# Altium PCB USB_Control.PcbDoc (part 2 of 2)
Units mil, origin at the board's own origin, x right, y up, seen from the top; angles counter-clockwise.
Board outline 3100 x 2250 mil, 4 copper layers (Component Side, Ground Plane, Power Plane, Solder Side), stack 26.634 mil thick; 203 components, 126 nets, 671 pads, 284 vias.
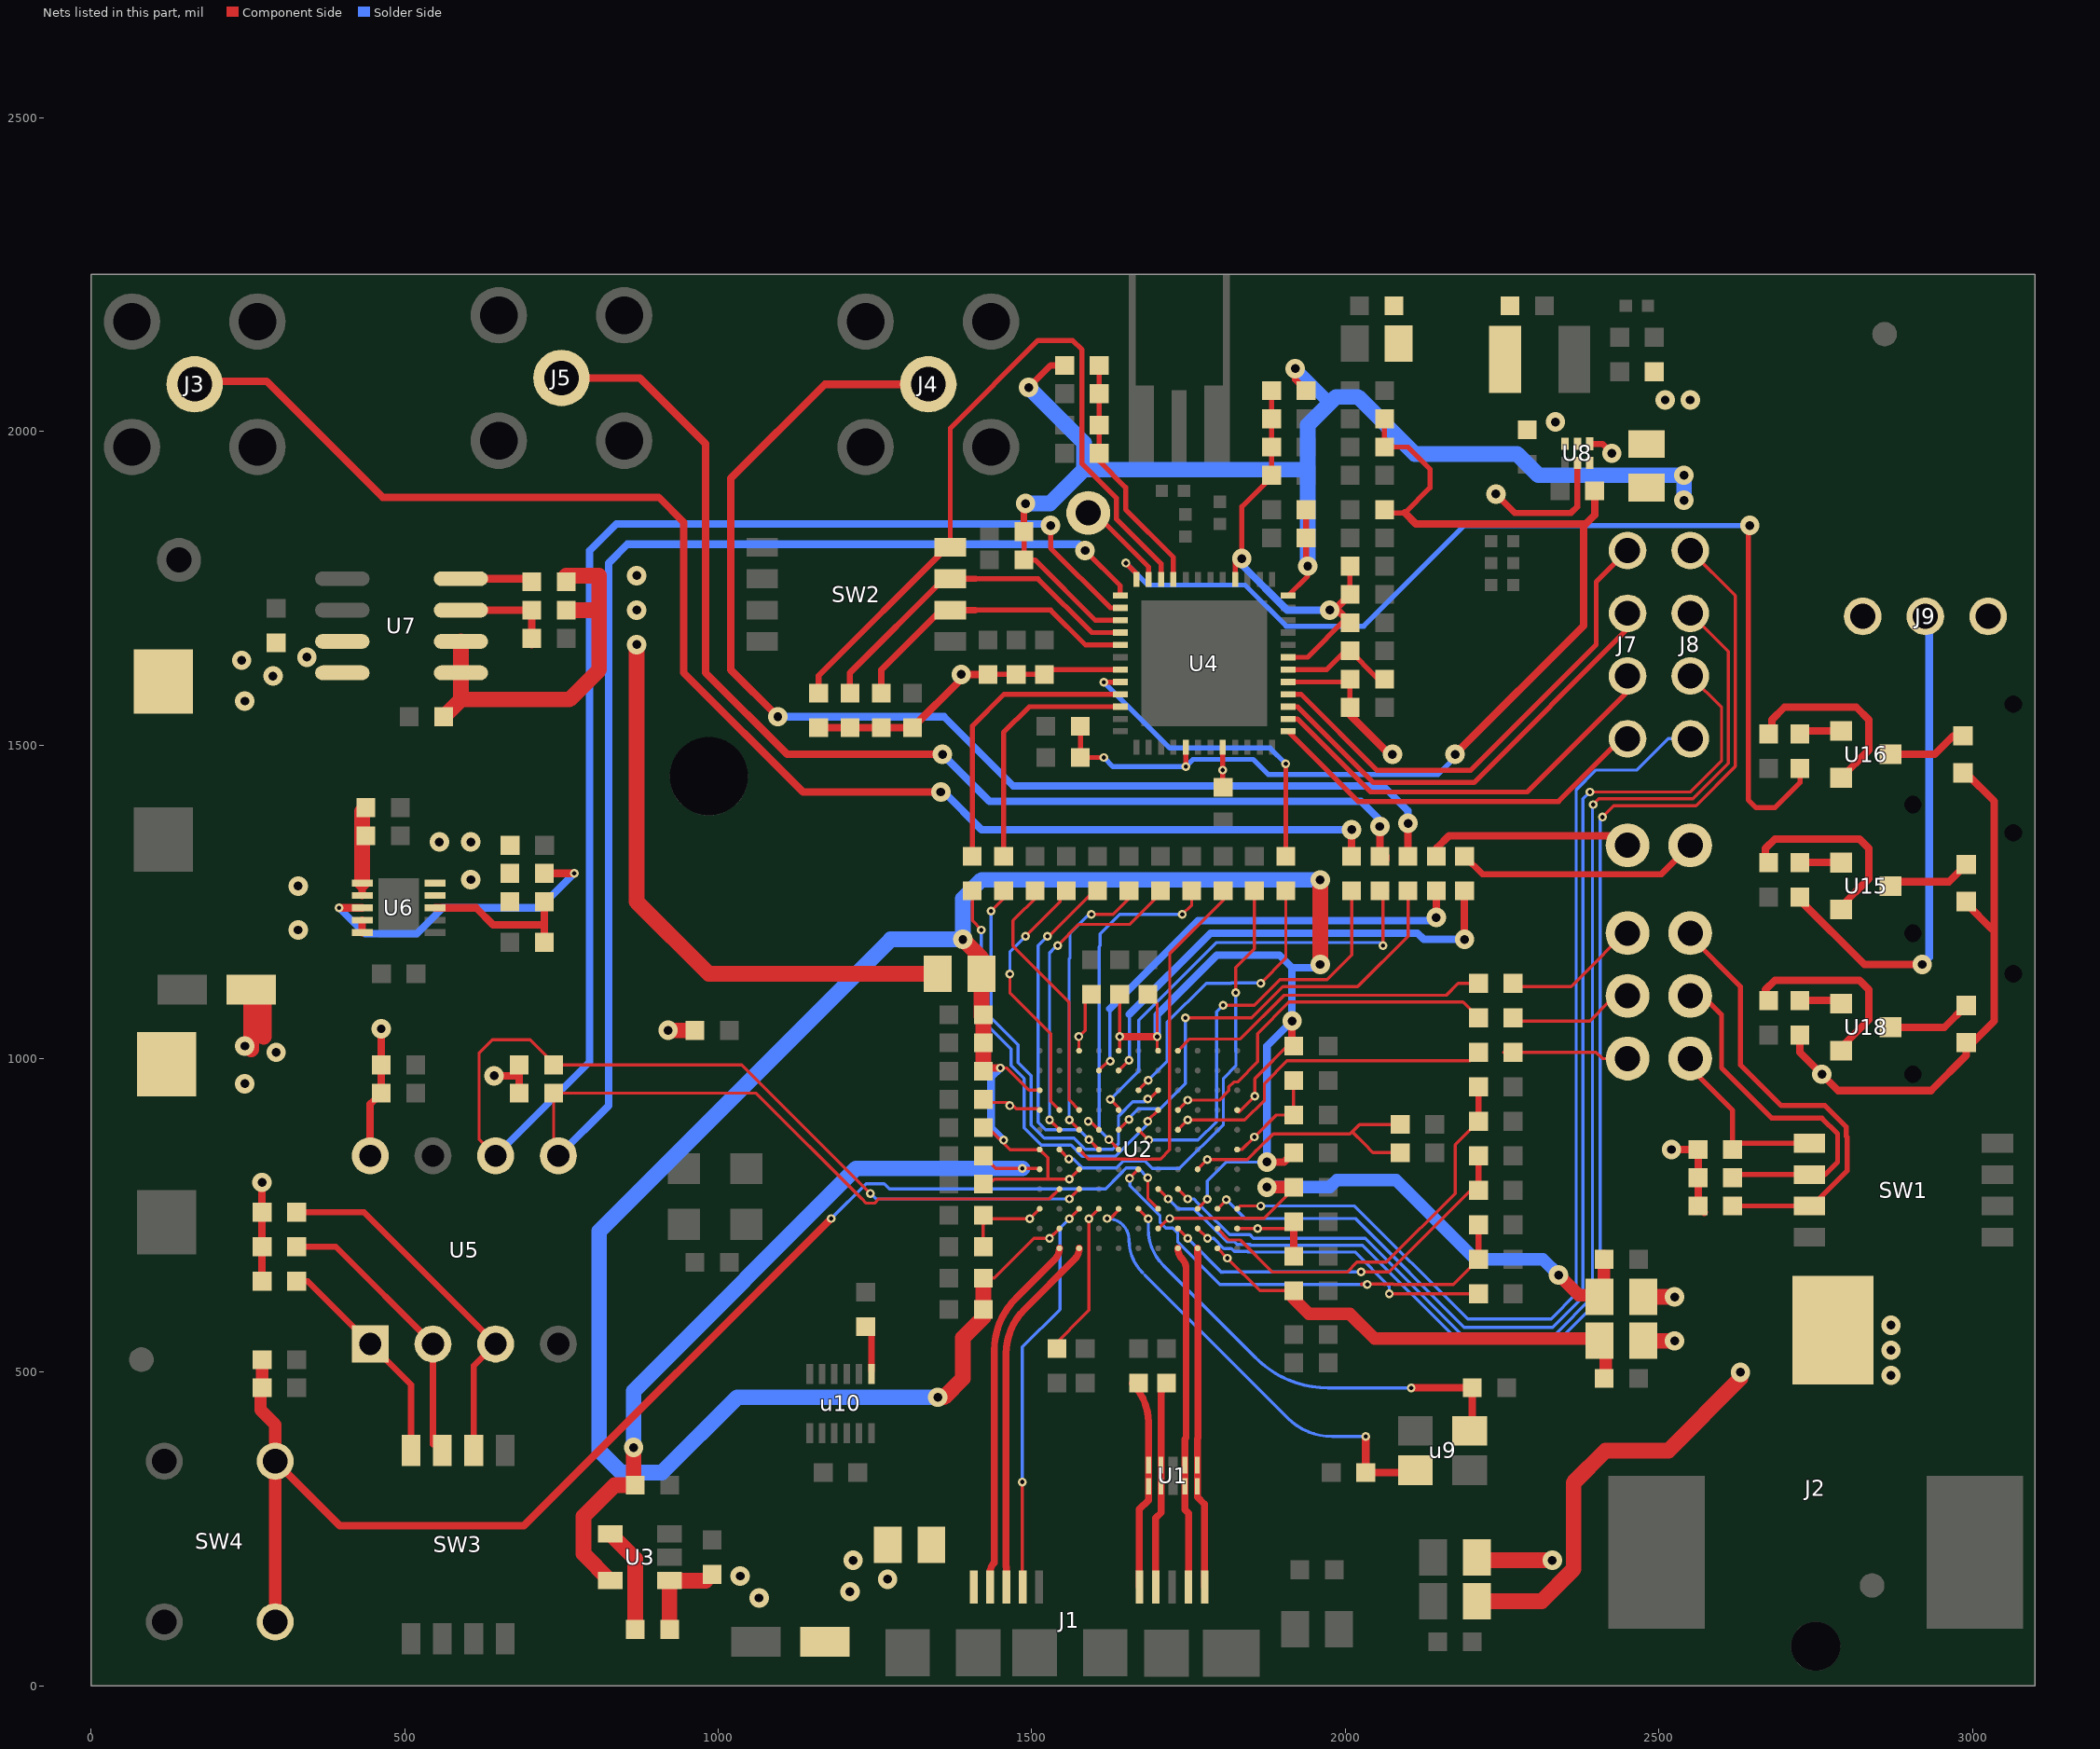
[diagram p4: the nets of this part, all layers, seen from the top]

## Via types
v1: diameter 31, hole 14, Component Side to Solder Side, tented both sides, 162 vias
v2: diameter 14, hole 7, Component Side to Solder Side, tented both sides, 109 vias
v3: diameter 19.68, hole 7.87, Component Side to Solder Side, tented both sides, 13 vias

## Nets (pads, with @x,y where several pads share a name; then routed paths per layer and width w, separated by ;. In a path a pad name is that pad's centre, name@x,y a point inside that pad or via, vN(x,y) a via of type N, cw(c..) or ccw(c..) an arc to the next point about the centre after c; other vN are vias at no path point) (continued)
NetC78_1: C78.1 R58.0 SW4.2 U2.C5 | length 2165.4
  Component Side w5: v2(1685,810) 1685,777.01 U2.C5@1701.5,760.51
  Component Side w12: SW4.2@293.58,357.95 396.53,255 690,255 v2(1180,745)
  Component Side w20: R58.0@270,472.5 270,440 293.58,416.42 SW4.2@293.58,357.95 SW4.2@293.58,102.05 ; R58.0@272.5,475 C78.1@272.5,520
  Solder Side w5: v2(1180,745) 1235.5,800.5 1264.5,800.5 1272.74,792.26 1617.81,792.26 1640.5,814.94 1640.5,815.42 1650.58,825.5 1669.5,825.5 v2(1685,810)
NetJ1_1: J1.1 L1.1
NetJ3_1: J3.1 R11.1 | length 2306.8
  Component Side w12: J3.1@180,2080 280,2080 465,1895 905,1895 945,1855 945,1615 1135,1425 v1(1355,1425) ; R11.1@2010,1325 v1(2010,1365)
  Solder Side w12: v1(1355,1425) 1360,1425 1420,1365 v1(2010,1365)
NetJ4_1: J4.1 R13.1 | length 1963.2
  Component Side w12: v1(1095,1545) 1020,1620 1020,1925 1170,2075 J4.1@1335,2075 J4.1@1360,2050 ; R13.1@2100,1322.5 2100,1342.5 v1(2100,1375)
  Solder Side w12: v1(1095,1545) 1360,1545 1470,1435 2060,1435 2100,1395 v1(2100,1375)
NetJ5_1: J5.1 R15.1 | length 1877.5
  Component Side w12: J5.1@750,2085 875,2085 980,1980 980,1615 1110,1485 v1(1357.5,1485) ; v1(2055,1370) 2055,1332.5 2065,1322.5 R15.1@2065,1317.5
  Solder Side w12: v1(1357.5,1485) 1432.5,1410 2025,1410 2055,1380 v1(2055,1370)
NetJ7_1: J7.1 U4.28 | length 795.1
  Component Side w8: U4.28@1908.86,1580.79 1929.21,1580.79 2050.5,1459.5 2199.5,1459.5 2400,1660 2400,1760 J7.1@2450,1810
NetJ7_2: J7.2 U4.27 | length 717.8
  Component Side w8: U4.27@1908.86,1561.1 1923.9,1561.1 2045,1440 2205,1440 2450,1685 J7.2@2450,1710
NetJ7_3: J7.3 U4.26 | length 680.6
  Component Side w8: U4.26@1908.86,1541.42 1923.58,1541.42 2040,1425 2290,1425 2450,1585 J7.3@2450,1610
NetJ7_4: J7.4 U4.25 | length 646.5
  Component Side w8: U4.25@1908.86,1521.73 2020.59,1410 2340,1410 2438.27,1508.27 2438.27,1521.73 J7.4@2450,1510
NetJ8_1: J8.1 U2.D5 | length 2222.5
  Component Side w5: U2.D5@1701.5,792.01 v2(1717.24,776.26) ; v2(2410,1385) 2428,1403 2559.11,1403 2622,1465.89 2622,1738 J8.1@2550,1810
  Solder Side w5: v2(1717.24,776.26) 1717.69,776.26 1733.69,760.26 1758.28,760.26 1769.02,749.52 1769.5,749.52 1810.75,708.27 1822.71,708.27 1827.48,703.5 1848.04,703.5 1849.02,702.52 2027.48,702.52 2180.36,549.64 2339.64,549.64 2406.5,616.5 2406.5,1381.5 v2(2410,1385)
NetJ8_2: J8.2 U2.D4 | length 2075.3
  Component Side w5: U2.D4@1732.99,792.01 v2(1748.74,776.26) ; v2(2395,1405) 2404,1414 2554.56,1414 2611,1470.44 2611,1649 J8.2@2550,1710
  Solder Side w5: v2(1748.74,776.26) 1758.32,776.26 1764.5,770.08 1764.5,769.6 1773.58,760.52 1774.05,760.52 1815.3,719.27 1847.82,719.27 1853.58,713.52 2032.04,713.52 2184.91,560.64 2335.09,560.64 2394,619.56 2394,1404 v2(2395,1405)
NetJ8_3: J8.3 U2.C2 | length 1889.5
  Component Side w5: U2.C2@1795.98,760.51 1810,774.53 v2(1810,775) ; v2(2390,1425) 2550,1425 2600,1475 2600,1560 J8.3@2550,1610
  Solder Side w5: v2(1810,775) 1840,745 2016.11,745 2189.47,571.64 2330.53,571.64 2379,620.11 2379,1414 v2(2390,1425)
NetJ8_4: J8.4 U2.C1 | length 1652.7
  Component Side w5: U2.C1@1827.48,760.51 1831.97,765 v2(1865,765)
  Solder Side w5: v2(1865,765) 2015,765 2195,585 2328.33,585 2368,624.67 2368,1428 2400,1460 2465,1460 2515,1510 J8.4@2550,1510
NetJ9_2: J9.2 L11.2 R60.1 | length 804.3
  Component Side w12: R60.1@2725,1257.5 2725,1252.79 2827.79,1150 v1(2920,1150)
  Solder Side w12: v1(2920,1150) 2931,1161 2931,1699 J9.2@2925,1705
  other v1: 2510,2050 2550,2050
NetK1_1: K1.1 R3.1 SW1.1 | length 299.6
  Component Side w8: K1.1@2550,1000 2550,985 2617.5,917.5 R3.1@2617.5,855 2627.5,865 SW1.1@2740,865
NetK2_1: K2.1 R2.1 SW1.2 | length 574.6
  Component Side w5: R2.1@2617.5,810 R2.1@2622.5,815
  Component Side w8: K2.1@2570,1090 2580,1090 2600,1070 2600,985 2680,905 2760,905 2785,880 2785,835 2765,815 SW1.2@2740,815 R2.1@2622.5,815
NetK3_1: K3.1 R1.1 SW1.3 | length 749.3
  Component Side w8: K3.1@2550,1220 2550,1195 2630,1115 2630,990 2695,925 2765,925 2799,891 2799,876 2800,875 2800,820.9 2744.1,765 SW1.3@2740,765 R1.1@2617.5,765
NetL5_1: L5.1 U8.2
NetL12_2: L12.2 L13.1 R56.1 R57.0
NetR4_1: R4.1 U2.C8 | length 254.9
  Component Side w5: R4.1@1530,537.5 1591.26,598.76 v2(1591.26,744.76) U2.C8@1607.01,760.51
NetR5_1: R5.1 U2.B3 | length 498.1
  Component Side w5: U2.B3@1764.49,729.02 v2(1780.24,713.27) ; v2(2070,625) R5.1@2212.5,625
  Solder Side w5: v2(1780.24,713.27) 1790.2,713.27 1806.19,697.27 1818.15,697.27 1822.92,692.5 1843.48,692.5 1844.47,691.52 2015.4,691.52 2070,636.92 v2(2070,625)
NetR6_0: R6.0 U2.L4 | length 524
  Component Side w5: U2.L4@1732.99,1012.48 1751.69,1031.18 1832.3,1031.18 1902.11,1101 2161,1101 2180,1120 R6.0@2212.5,1120
NetR7_0: R7.0 U2.H4 | length 591
  Component Side w5: U2.H4@1732.99,917.99 v2(1748.74,933.74) 1798.94,933.74 1814.26,949.06 1814.26,954.97 1822,962.71 1827.91,962.71 1860,994.8 1860,1040 1910,1090 2187.5,1090 R7.0@2212.5,1065
NetR8_0: R8.0 U2.G4 | length 546.4
  Component Side w5: U2.G4@1732.99,886.5 v2(1748.74,902.24) 1839.64,902.24 1870.97,933.58 1870.97,960.49 1906.98,996.5 2199,996.5 R8.0@2212.5,1010
NetR9_0: R9.0 U2.H5 | length 682.7
  Component Side w5: R9.0@1405,1267.5 1405,1220 1419.5,1205.5 v2(1419.5,1205) v2@1420,1205 ; v2(1685,900) v2@1685,901.5 ; v2@1685,905 v2@1685,901.5 ; U2.H5@1701.5,917.99 v2@1685,901.5
  Solder Side w5: v2(1419.5,1205) 1419.5,1062.5 1467,1015 1467,989.02 1488,968.03 1488,889.48 1515.44,862.04 1562.5,862.04 1580.28,844.25 1633.73,844.25 1685,895.52 v2(1685,900)
NetR9_1: R9.1 U4.9 | length 464.7
  Component Side w8: R9.1@1405,1322.5 1405,1530 1455.79,1580.79 U4.9@1641.14,1580.79
NetR10_0: R10.0 U2.J5 | length 692
  Component Side w5: v2(1435,1235) 1455,1255 R10.0@1455,1267.5 ; v2@1685,935 v2(1685,935.5) 1687.51,935.5 U2.J5@1701.5,949.49
  Solder Side w5: v2(1435,1235) 1435,1065 1478,1022 1478,993.58 1499,972.58 1499,894.04 1520,873.04 1567.05,873.04 1584.84,855.25 1629.18,855.25 1638.26,864.33 1638.26,908.18 1661.08,931 1680.5,931 v2(1685,935.5)
NetR10_1: R10.1 U4.10 | length 400.7
  Component Side w8: R10.1@1455,1322.5 1455,1520 1496.1,1561.1 U4.10@1641.14,1561.1
NetR11_0: R11.0 U2.G6 | length 674
  Component Side w5: U2.G6@1670,886.5 v2(1686.5,870) ; v2(1805,1085) 1855,1085 1896,1126 1971,1126 2010,1165 R11.0@2010,1267.5
  Solder Side w5: v2(1686.5,870) 1765,870 1794.5,899.5 1794.5,1074.5 v2(1805,1085)
NetR12_0: R12.0 U2.D9 U4.2 U5.6 | length 3234.5
  Component Side w5: U5.6@645,845 618.5,871.5 618.5,1008.5 640,1030 700,1030 740,990 1037.52,990 v2(1242.52,785) ; v2(1559.76,776.26) U2.D9@1575.51,792.01
  Component Side w8: v1(1530,1850) 1530,1814 1625.42,1718.58 U4.2@1641.14,1718.58
  Solder Side w5: v2(1242.52,785) 1251.26,776.26 v2(1559.76,776.26)
  Solder Side w12: U5.6@645,845 795,995 795,1810 837.5,1852.5 1537.5,1852.5 1535,1850 v1(1530,1850)
NetR13_0: R13.0 U2.G7 | length 709.9
  Component Side w5: U2.G7@1638.5,886.5 v2(1655,903) v2@1655,905 ; v2(1745,1065) 1850.56,1065 1900.56,1115 1923.08,1115 1923.58,1114.5 2019.5,1114.5 2100,1195 R13.0@2100,1252.5
  Solder Side w5: v2@1655,905 1670,920 1705,920 1745,960 v2(1745,1065)
NetR14_0: R14.0 U2.D10 U4.1 U5.5 | length 2830.7
  Component Side w5: U5.5@737.5,852.5 R14.0@737.5,945 1060,945 1228.74,776.26 1229.34,776.26 1236.1,769.5 1248.94,769.5 1255.7,776.26 1528.27,776.26 U2.D10@1544.02,792.01
  Component Side w8: v1(1585,1810) 1641.14,1753.86 U4.1@1641.14,1738.27
  Solder Side w12: U5.5@745,845 825,925 825,1790 855,1820 1575,1820 v1(1585,1810)
NetR15_0: R15.0 U2.H7 | length 701
  Component Side w5: v2(1625,935) 1638.5,921.5 U2.H7@1638.5,917.99 ; v2(2060,1180) 2060,1260 R15.0@2067.5,1267.5
  Solder Side w5: v2(1625,935) 1670.5,980.5 1670.5,1061.01 1794.49,1185 2055,1185 v2(2060,1180)
NetR16_0: R16.0 U2.K7 | length 771.3
  Component Side w5: U2.K7@1638.5,980.98 v2(1655,997.48)
  Component Side w12: v1(2190,1190) R16.0@2190,1267.5
  Solder Side w5: v2(1655,997.48) 1655.5,997.98 1655.5,1070.5
  Solder Side w12: 1655.5,1070.5 1785,1200 2115,1200 2125,1190 v1@2195,1190
NetR16_1: R16.1 TP3.1 | length 390.9
  Component Side w10: R16.1@2190,1322.5 2218.5,1294 2504,1294 TP3.1@2550,1340
NetR17_0: R17.0 U2.K8 | length 727.4
  Component Side w5: U2.K8@1607.01,980.98 v2@1625,998.98
  Component Side w12: v1(2145,1225) R17.0@2145,1267.5
  Solder Side w5: 1624.5,1079.5 1624.5,999.48 v2@1625,998.98
  Solder Side w12: 1624.5,1079.5 1765,1220 v1@2145,1220
  other v2: 1625,996
NetR17_1: R17.1 TP4.1 | length 341.5
  Component Side w12: R17.1@2146.25,1321.25 2146.25,1336.25 2165,1355 2450,1355 TP4.1@2450,1340
NetR18_0: R18.0 U2.J6 | length 466.7
  Component Side w5: U2.J6@1670,949.49 v2(1685.75,965.24) ; v2(1865,1120) 1905,1160 R18.0@1905,1267.5
  Solder Side w5: v2(1685.75,965.24) 1715.5,994.99 1715.5,1057.42 1778.08,1120 1818.08,1120 1818.58,1120.5 1864.5,1120.5 v2(1865,1120)
NetR18_1: R18.1 U4.8 | length 517.7
  Component Side w8: v2(1615,1600) 1640.67,1600 U4.8@1641.14,1600.47 ; R18.1@1905,1322.5 v2(1905,1470)
  Solder Side w8: v2(1615,1600) 1720,1495 1880,1495 v2(1905,1470)
NetR19_0: R19.0 U2.H9 | length 402.3
  Component Side w5: R19.0@1510,1260 1470,1220 1470,1179.71 1559.27,1090.44 1559.27,1088.81 1559.5,1088.58 1559.5,934 U2.H9@1575.51,917.99
NetR20_0: R20.0 U2.H10 | length 418.5
  Component Side w5: v2(1465,1135) 1465,1105 1530,1040 1530,932.01 U2.H10@1544.02,917.99 ; v2@1486.92,1195 v2(1490,1195) 1510.96,1215.96 1545,1250 R20.0@1545,1267.5
  Solder Side w5: v2(1465,1135) 1465,1170 v2(1490,1195)
NetR21_0: R21.0 U2.F8 | length 522.7
  Component Side w5: v2(1525,1195) 1527.5,1195 R21.0@1600,1267.5 ; v2(1591.26,870.75) U2.F8@1607.01,855
  Solder Side w5: v2(1525,1195) 1510,1180 1510,898.59 1521.85,886.74 1575.26,886.74 v2(1591.26,870.75)
NetR22_0: R22.0 U2.G9 | length 450
  Component Side w5: v2(1559.76,902.24) U2.G9@1575.51,886.5 ; v2(1595,1230) 1630,1230 1655,1255 R22.0@1655,1267.5
  Solder Side w5: v2(1559.76,902.24) 1559.5,902.51 1559.5,1159.5 1561,1161 1561,1199.94 1591.06,1230 v2(1595,1230)
NetR23_0: R23.0 U2.G10 | length 504.8
  Component Side w5: v2(1528.27,902.24) U2.G10@1544.02,886.5 ; v2(1541.06,1180) 1575.06,1214 1656.5,1214 R23.0@1710,1267.5
  Solder Side w5: v2(1528.27,902.24) 1528.27,1168.27 v2@1536.3,1176.3
NetR24_0: R24.0 U2.F7 | length 555.2
  Component Side w5: v2(1622.76,870.75) U2.F7@1638.5,855 ; v2(1740,1230) 1755,1245 R24.0@1755,1267.5 R24.0@1765,1267.5
  Solder Side w5: v2(1622.76,870.75) 1607.26,886.25 1607.26,1178.32 1609,1180.06 1609,1199 1640,1230 v2(1740,1230)
NetR25_0: R25.0 U2.F9 | length 604.7
  Component Side w5: U2.F9@1575.51,855 1590.51,840 1705.2,840 1719.77,854.57 1719.77,1094.77 1720,1095 1720,1167.5 1805,1252.5 R25.0@1805,1267.5
NetR26_0: R26.0 R30.1 U2.B2 | length 645.3
  Component Side w5: U2.B2@1795.98,729.02 1814.26,710.74 1832.96,710.74 1884.2,659.5 2002.58,659.5 2018.58,675.5 2065.5,675.5 2175,785 2175,862.5 R26.0@2212.5,900
  Component Side w10: R26.0@2212.5,900 R30.1@2212.5,955
NetR27_0: R27.0 R31.1 U2.B4 | length 618
  Component Side w5: U2.B4@1732.99,729.02 v2(1748.74,713.27) ; v2(2025,660) 2070,660 2200,790 R27.0@2212.5,790
  Component Side w10: R27.0@2212.5,790 R31.1@2212.5,845
  Solder Side w5: v2(1748.74,713.27) 1803.26,658.75 1804.51,660 v2(2025,660)
NetR28_0: R28.0 R32.1 U2.E6 | length 759.1
  Component Side w5: v2@1656.5,810 U2.E6@1670,823.5 ; v2(2035,640) 2026,640 2025.5,640.5 2061.42,640.5 2061.92,640 2063.08,640 2063.58,640.5 2076.42,640.5 2076.92,640 2172.5,640 R28.0@2212.5,680
  Component Side w10: R28.0@2212.5,680 R32.1@2212.5,735
  Solder Side w5: v2@1656.5,810 1656.5,797.43 1671.25,782.68 1671.25,782.19 1704.5,748.94 1704.5,738.58 1713.58,729.5 1725,729.5 1732.74,721.76 1732.74,707.34 1800.09,640 v2(2035,640)
  other v2: 1656,809
NetR29_0: R29.0 U2.F10 | length 705.5
  Component Side w5: U2.F10@1544.02,855 v2(1559.02,840) ; v2(1825,1105) 1825,1145 1855,1175 R29.0@1855,1267.5
  Solder Side w5: v2(1559.02,840) 1566.41,840 1580.91,825.5 1635.02,825.5 1646.02,836.5 1680.42,836.5 1691.92,825 1735.56,825 1805.5,894.94 1805.5,968.58 1825.5,988.58 1825.5,1010.5 1825,1011 v2(1825,1105)
NetR33_0: R33.0 U3.4 | length 168.9
  Component Side w25: U3.4@827.76,242.4 867.5,202.66 R33.0@867.5,90
NetR47_0: R47.0 SW3.8 U5.1 | length 360.8
  Component Side w10: R47.0@327.5,645 345,645 U5.1@445,545 510,480 SW3.8@510,370
NetR48_0: R48.0 SW3.7 U5.2 | length 462.9
  Component Side w10: R48.0@327.5,700 390,700 U5.2@545,545 545,390 ; 545,385 545,390 ; SW3.7@560,375 545,390
NetR49_0: R49.0 SW3.6 U5.3 | length 594
  Component Side w10: R49.0@327.5,755 435,755 U5.3@645,545 610,510 SW3.6@610,375 SW3.6@610,370
NetR50_0: R50.0 U6.3 | length 515.1
  Component Side w12: v2(395.31,1240.31) U6.3@432.24,1240.31 ; R50.0@725.31,1297.81 727.81,1295.31 v2(770.31,1295.31)
  Solder Side w12: v2(395.31,1240.31) 436.84,1198.79 519.05,1198.79 560.57,1240.31 715.31,1240.31 v2(770.31,1295.31)
NetR51_0: R51.0 U7.8 | length 108
  Component Side w12: U7.8@589.49,1765 R51.0@697.5,1765
NetR52_0: R52.0 R54.1 U7.7 | length 168
  Component Side w12: U7.7@589.49,1715 R52.0@702.5,1715 R54.1@702.5,1660
NetR53_0: R53.0 R55.1 U6.8 | length 240.1
  Component Side w12: U6.8@548.38,1240.31 613.81,1240.31 640.81,1213.31 722.31,1213.31 ; R55.1@722.81,1185.31 R53.0@722.81,1240.31
NetR59_0: R59.0 u10.7 | length 69.5
  Component Side w10: u10.7@1244.21,502.24 R59.0@1244.21,571.71
NetR60_0: R60.0 U15.B | length 55.7
  Component Side w12: R60.0@2725,1312.5 U15.B@2780.73,1312.5
NetR61_0: R61.0 U16.B | length 60.7
  Component Side w12: R61.0@2729.9,1522.4 U16.B@2790.63,1522.4
NetR61_1: R61.1 U4.48 | length 1701.5
  Component Side w8: v2(1650,1790) 1666.73,1773.27 U4.48@1666.73,1763.86 ; v1@2642.5,1847.5 2642.5,1412.5 2655,1400 2685,1400 2725,1440 R61.1@2725,1462.5
  Component Side w12: v1@2642.5,1847.5 v1(2645,1850)
  Solder Side w8: v2(1650,1790) 1685,1755 1840,1755 1905.5,1689.5 2029.5,1689.5 2190,1850 v1(2645,1850)
NetR63_0: R63.0 U18.B | length 60.7
  Component Side w12: R63.0@2720,1092.5 R63.0@2725,1092.5 U18.B@2780.73,1092.5
NetR64_1: R64.1 U18.E | length 310.7
  Component Side w12: R64.1@2670,1087.5 2670,1110 2685,1125 2820,1125 2835,1110 2835,1061.97 U18.E@2790.63,1017.6
NetR65_1: R65.1 U15.E | length 315.7
  Component Side w12: R65.1@2670,1307.5 2670,1335 2685,1350 2820,1350 2835,1335 2835,1286.97 U15.E@2790.63,1242.6
NetR66_1: R66.1 U16.E | length 294.8
  Component Side w12: R66.1@2680,1527.5 2680,1540 2700,1560 2815,1560 2835,1540 2835,1491.97 U16.E@2790.63,1447.6
NetTP2_1: TP2.1 U4.47 | length 151.9
  Component Side w8: TP2.1@1590,1870 1600,1870 1686.42,1783.58 U4.47@1686.42,1763.86
NetU11_C: U11.C U15.C | length 132
  Component Side w12: U15.C@2869.37,1281.97 2962.47,1281.97 U11.C@2990,1309.5
NetU12_C: U12.C U16.C | length 132.8
  Component Side w12: U16.C@2869.37,1485 2940,1485 2969.5,1514.5 U12.C@2990,1514.5
NetU14_C: U14.C U18.C | length 134.9
  Component Side w12: U18.C@2869.37,1050 2955.5,1050 U14.C@2990,1084.5
OEN: R39.0 SW2.2 U4.5 | length 481
  Component Side w8: 1410,1715 1530,1715 1585.47,1659.53 U4.5@1641.14,1659.53
  Component Side w10: R39.0@1260,1582.5 1260,1620 1355,1715 1410,1715
OSS_SEL: R38.0 SW2.3 U4.4 | length 561.3
  Component Side w8: 1410,1765 1510,1765 1595.79,1679.21 U4.4@1641.14,1679.21
  Component Side w10: R38.0@1210,1582.5 1210,1615 1360,1765 1410,1765
OTG_ID: J1.4 U2.C9 | length 639.8
  Component Side w5: J1.4@1485,158.25 v2(1485,325) ; v2(1559.76,744.76) U2.C9@1575.51,760.51
  Solder Side w5: v2(1485,325) 1485,540 1545,600 1545,730 v2(1559.76,744.76)
PDN: C30.0 R36.1 U4.30 | length 187.7
  Component Side w8: U4.30@1908.86,1620.16 1970.16,1620.16 2003.75,1653.75 R36.1@2052.5,1605 ; R36.1@2052.5,1600 R36.1@2062.5,1600
PMODE_0: K1.2 R8.1 | length 201.6
  Component Side w5: R8.1@2252.5,1010 R8.1@2267.5,1010 2400,1010 2410,1000 K1.2@2450,1000
PMODE_1: K2.2 R7.1 | length 207.4
  Component Side w5: R7.1@2255,1060 2390,1060 2420,1090 K2.2@2450,1090
PMODE_2: K3.2 R6.1 | length 243.5
  Component Side w5: R6.1@2265,1115 2360,1115 K3.2@2465,1220
SEL: R37.0 SW2.4 U4.46 | length 1205.3
  Component Side w8: SW2.4@1370,1815 1370,2005 1510,2145 1565,2145 1580,2130 1580,1948.36 1635,1893.36 1635,1860 1706.1,1788.9 U4.46@1706.1,1763.86
  Component Side w10: R37.0@1160,1582.5 1160,1610.52 1364.48,1815 SW2.4@1370,1815
SS_D_N: J1.2 U2.A10 | length 578.4
  Component Side w11: J1.2@1433.5,157.75 1433.5,180.56 cw(c1455.69,180.56) 1440,196.25 1440,533.99 cw(c1559,533.99) 1474.85,618.13 1536.79,680.07 ccw(c1519.33,697.52) U2.A10@1544.02,697.52
SS_D_P: J1.3 U2.A9 | length 582.8
  Component Side w11: J1.3@1459.5,157.75 1459.5,189.04 ccw(c1457.79,189.04) 1459,190.25 1459,529.36 cw(c1559,529.36) 1488.29,600.07 1568.28,680.07 ccw(c1550.83,697.52) U2.A9@1575.51,697.52
SS_RX_N: J1.10 U1.5 U1.6 U2.A3 | length 543.7
  Component Side w11: 1764,394 U1.6@1764,352 U1.5@1764,318 1764,301 1775.5,289.5 J1.10@1775.5,157.75 ; U2.A3@1764.49,697.52 1764.49,688.02 ccw(c1766.24,688.02) 1765,686.78 1765,395
SS_RX_P: J1.9 U1.4 U1.7 U2.A4 | length 543.2
  Component Side w11: U2.A4@1732.99,697.52 ccw(c1757.68,697.52) 1740.22,680.07 cw(c1726.27,666.12) 1746,666.12 1746,395 ; 1744,393 U1.7@1744,352 U1.4@1744,318 1744,281 1750,275 J1.9@1750,158.25
SS_TX_N: C2.0 J1.6 U1.1 U1.10 | length 337.7
  Component Side w11: C2.0@1660,482.5 cw(c1597.23,419.73) 1686,419.73 U1.10@1686,352 U1.1@1686,318 1686,296 1671.5,281.5 J1.6@1671.5,157.75
SS_TX_P: C3.0 J1.7 U1.2 U1.9 | length 330.7
  Component Side w11: J1.7@1697.5,157.75 1697.5,267.5 1706,276 U1.2@1706,318 U1.9@1706,352 1706,460.77 cw(c1736.73,460.77) C3.0@1715,482.5
U3RX_VDDQ: C54.1 C55.1 L9.2 U2.A2 | length 726.8
  Component Side w5: U2.A2@1795.98,697.52 v2(1811.73,681.77) 1863.5,630 C54.1@1917.5,630
  Component Side w20: C54.1@1917.5,630 1917.5,617.5 1942,593 2007,593 2046.5,553.5 2398.66,553.5 L9.2@2400.16,555 ; C55.1@2415.16,490 L9.2@2415.16,545
U3TX_VDDQ: C56.1 C57.1 L10.2 U2.B5 | length 975.3
  Component Side w5: U2.B5@1701.5,729.02 1713.54,741.06 1715.42,741.06 1719.86,745.5 1870.5,745.5 1917.5,792.5 C56.1@1917.5,795 C56.1@1917.5,805
  Component Side w20: v1(1875,795) C56.1@1917.5,795 ; v1(2340,655) 2372.5,622.5 2407.34,622.5 2412.5,627.66 C57.1@2412.5,685
  Solder Side w20: v1(1875,795) 1975,795 1986.5,806.5 2080.78,806.5 2207.28,680 2315,680 v1(2340,655)
  other v2: 1720,745
USB3_VBUS: C5.1 C69.1 U2.E11 U3.5 | length 1240.3
  Component Side w5: C69.1@1422.5,845 1442.5,825 v2(1485,825) 1511.02,825 U2.E11@1512.52,823.5
  Component Side w25: U3.5@827.76,167.6 785,210.36 785,270 835,320 C5.1@867.5,320 865,322.5 v1(865,380)
  Solder Side w25: v1(865,380) 865,470 1220,825 v2(1485,825)
V1P2: C72.+ L6.1 L7.1 L9.1 L10.1 R51.1 R52.1 U7.5 U7.6 | length 2317.8
  Component Side w25: C72.+@562,1545 589.49,1572.49 ; U7.6@589.49,1665 U7.5@589.49,1615 589.49,1572.49 ; R52.1@757.5,1715 805,1715 ; R51.1@757.5,1770 810,1770 810,1620 762.49,1572.49 589.49,1572.49 ; v1(870,1660) 870,1250 985,1135 L6.1@1350.16,1135 ; L7.1@2209.84,135 2313.08,135 2364,185.92 2364,324 2415,375 2515,375 2630,490 v1(2630,500) ; L9.1@2474.84,550 v1(2525,550) ; L10.1@2474.84,620 v1(2525,620)
  other v1: 870,1715 870,1770
V5P0: C4.1 C33.1 C34.1 C35.1 C36.1 C67.+ C68.+ C70.1 J9.3 L1.2 R33.1 U3.1 U6.1 U6.2 U6.4 U6.5 U7.3 U7.4 | length 475.6
  Component Side w12: U6.5@432.24,1200.94 U6.4@432.24,1220.63 ; U6.2@432.24,1260 U6.1@432.24,1279.68
  Component Side w25: v1@255.12,1014.88 C33.1@255.12,1110 275,1090.12 275,1035 ; U6.1@432.24,1279.68 432.24,1394.24 C67.+@438,1400 ; R33.1@922.24,90.26 U3.1@922.24,167.6 C4.1@980.1,167.6
  other v1: 1065,140 1210,150 1270,170 1035,175 1215,200 245,960 295,1010 245,1020 330,1205 330,1275 245,1570 290,1610 240,1635 344,1640
V12P0: J2.1 J9.1
  other v1: 2870,495 2870,535 2870,575
VDD: C39.1 C40.1 C41.1 C42.1 C43.1 C44.1 C45.1 C46.1 C47.1 C48.1 C49.1 L6.2 U2.B10 U2.C3 U2.E9 U2.F11 U2.H1 U2.J11 U2.L5 U2.L7 | length 4997.9
  Component Side w5: C41.1@1422.5,650 1440,650 1503.27,713.27 v2(1528.27,713.27) U2.B10@1544.02,729.02 ; C49.1@1422.5,790 1440.26,807.76 v2(1559.76,807.76) U2.E9@1575.51,823.5 ; C46.1@1430,890 1465.5,854.5 1512.02,854.5 U2.F11@1512.52,855 1525.74,841.78 1525.74,808.5 ; v2(1450,985) 1460,985 1485,960 1495.51,949.49 U2.J11@1512.52,949.49 ; U2.L7@1638.5,1012.48 1640,1013.98 v2(1640,1035) C40.1@1640,1092.5 ; C45.1@1685,1102.5 1700,1087.5 v2(1700,1035) 1700,1013.98 U2.L5@1701.5,1012.48 ; U2.C3@1764.49,760.51 v2(1780,776.02) ; U2.H1@1827.48,917.99 1830.47,915 v2(1855.47,940) 1855.47,967.97 1915,1027.5 C48.1@1917.5,1030 ; C48.1@1905,1015 C48.1@1907.5,1015
  Component Side w12: C42.1@1422.5,1010 1422.5,992.5 1430,985 v2(1450,985) ; v2(1640,1035) v2(1700,1035) ; v1(1875,835) 1902.5,835 C47.1@1907.5,840 ; C48.1@1915,1022.5 1915,1027.5 v1(1915,1060)
  Component Side w25: v1(1350,460) 1360,460 1390,490 1390,555 1422.5,587.5 C41.1@1422.5,650 ; v1(1390,1190) 1419.84,1160.16 L6.2@1419.84,1135 C39.1@1419.84,1067.66 ; C43.1@1422.5,980 C42.1@1422.5,1025 ; C42.1@1422.5,1010 C39.1@1422.5,1065 ; v1(1960,1150) v1(1960,1285)
  Solder Side w5: v2(1780,776.02) 1780,805 1810,835 v1(1875,835)
  Solder Side w12: v2(1450,985) 1435,970 1435,890 v2(1455,870) ; v2(1700,1035) 1700,1070 1795,1165 1895,1165 1915,1145 ; v1(1875,835) 1875,1020 v1(1915,1060) 1915,1145 ; v1@1970,1150 cw(c1957.93,1162.07) 1957.93,1145 1915,1145
  Solder Side w25: 1272.5,1187.5 810,725 810,375 845,340 910,340 1030,460 v1(1350,460) ; 1275,1190 v1(1390,1190) 1390,1255 1420,1285 v1(1960,1285)
VDDCML0: C11.0 C12.0 C13.0 C16.0 C17.0 C18.0 L4.2 U4.31 U4.40 | length 742.1
  Component Side w8: U4.40@1824.21,1763.86 1824.21,1794.21 1835,1805 1835,1880 C11.0@1881.25,1926.25 ; C11.0@1882.5,1920 L4.2@1882.5,2055 ; U4.31@1908.86,1639.84 1939.84,1639.84 C16.0@2001.25,1701.25 ; C18.0@2007.5,1740 C17.0@2007.5,1780
  Component Side w12: v1(1975,1715) v1@1982.5,1715 ; C16.0@2007.5,1695 2001.25,1701.25 1987.5,1715 v1@1982.5,1715 ; C18.0@2007.5,1740 v1@1982.5,1715
  Solder Side w12: v1@1834.93,1789.93 v1(1834.93,1797.17) 1834.93,1787.38 1907.3,1715 v1(1975,1715)
VDDD: C6.0 C7.0 C14.0 C15.0 C19.0 C20.0 C75.0 L3.1 L4.1 L5.2 R41.1 R42.1 R43.1 U4.3 U4.17 U4.36 U8.6 | length 3980.3
  Component Side w8: C19.0@1487.5,1840 C20.0@1487.5,1795 1505,1795 1601.1,1698.9 U4.3@1641.14,1698.9 ; C7.0@1577.5,1530 C6.0@1577.5,1480 v2(1615,1480) ; v2@1745,1465 v2(1745.47,1465.47) U4.17@1745.47,1496.14 ; U4.36@1908.86,1738.27 1940,1769.41 v1(1940,1785) ; R42.1@2062.5,1870 2095,1870 2135,1910 2135,1940 2100,1975 R41.1@2062.5,1975 R43.1@2062.5,2020
  Component Side w10: C19.0@1487.5,1840 1487.5,1882.5 v1(1490,1885) ; v1(1495,2070) 1530,2105 L3.1@1552.5,2105 ; v1(1920,2100) 1920,2082.5 L4.1@1937.5,2065 ; C14.0@1937.5,1875 C15.0@1937.5,1830 1937.5,1787.5 v1(1940,1785)
  Component Side w12: 2095,1870 2112.5,1852.5 2383.49,1852.5 ; v1(2175,1485) 2380,1690 2380,1849.01 2397.5,1866.51 C75.0@2397.5,1905
  Solder Side w8: v2(1615,1480) 1629.53,1465.47 v2(1745.47,1465.47) 1757,1477 1853,1477 1877,1453 2148,1453 2180,1485 v1(2175,1485)
  Solder Side w20: v1(1920,2100) 1975,2045
  Solder Side w25: v1(1490,1885) 1529.34,1885 1583.34,1939 ; v1(1495,2070) 1583.34,1981.66 1583.34,1939 ; v1(1940,1785) 1940,1935 ; v1(2540,1890) v1(2540,1930) 2308.08,1930 2274.08,1964 2111,1964 2020,2055 1985,2055 1975,2045 1940,2010 1940,1939 1583.34,1939
VDDIO1: C23.0 C24.0 C25.0 C28.0 C29.0 C31.0 C32.0 C37.1 C38.1 C58.1 C59.1 C60.1 C61.1 C62.1 C63.1 C64.1 C65.1 C66.1 C71.+ C74.0 L8.2 R1.0 R2.0 R3.0 R12.1 R14.1 R36.0 R37.1 R38.1 R39.1 R40.1 R47.1 R48.1 R49.1 R50.1 R53.1 R63.1 U2.B1 U2.C11 U2.E3 U2.F1 U2.G8 U2.H11 U2.L9 U4.7 U4.20 U4.29 U5.8 U6.9 U6.10 U8.1 U8.3 U8.5 U11.A U12.A U14.A | length 3830.2
  Component Side w5: C38.1@1422.5,700 1422.5,735 1432.26,744.76 v2(1496.77,744.76) U2.C11@1512.52,760.51 ; C58.1@1422.5,930 1465,930 1475,920 1510.51,920 U2.H11@1512.52,917.99 ; U2.L9@1575.51,1012.48 1575,1012.99 v2(1575,1035) 1585,1045 C59.1@1585,1102.5 ; v2(1590,900) 1593.5,900 U2.G8@1607.01,886.5 ; U2.E3@1764.49,823.5 v2(1780,839.02) 1844.02,839.02 1850.5,845.5 1850.5,846.01 1858.99,854.5 1859.5,854.5 1885,880 2007.5,880 2010.72,883.22 ; U2.B1@1827.48,729.02 v2(1860,729.02) C66.1@1906.52,729.02 ; U2.F1@1827.48,855 1835,855 v2(1855,875) 1890,910 C62.1@1917.5,910 C61.1@1917.5,965 ; 2072.5,895 2022.5,895 2010.72,883.22 ; C64.1@2087.5,850 2043.94,850 2029.94,864 2010.72,883.22
  Component Side w8: C28.0@1430,1612.5 1517.5,1612.5 1525.16,1620.16 U4.7@1641.14,1620.16 ; C29.0@1804.53,1432.5 U4.20@1804.53,1496.14 ; U4.29@1908.86,1600.47 2007.03,1600.47 2007.5,1600 C25.0@2007.5,1555
  Component Side w10: v1(2240,1900) 2270,1870 2360,1870 2370,1880 U8.5@2370,1949.68 ; U8.1@2389.69,1980 2410,1980 v1(2425,1965)
  Component Side w12: R47.1@272.5,645 R48.1@272.5,700 R49.1@272.5,755 v1(272.5,802.5) ; U5.8@445,845 445,927.5 C32.0@462.5,945 v1(462.5,1047.5) ; v1(642.5,972.5) 682.5,972.5 ; R14.1@682.5,945 682.5,972.5 ; R12.1@682.5,990 682.5,972.5 ; R37.1@1160,1527.5 R38.1@1210,1527.5 R39.1@1260,1527.5 R40.1@1310,1527.5 1387.5,1605 v1(1387.5,1612.5) C28.0@1430,1612.5 ; C65.1@1917.5,685 C66.1@1917.5,740 ; C25.0@2007.5,1555 2007.5,1547.5 2070,1485 v1(2075,1485) ; v1(2520,855) R3.0@2562.5,855 R1.0@2562.5,760 ; R1.0@2567.5,760 R1.0@2572.5,755 ; R63.1@2725,1037.5 2725,1010 2786,949 2934,949 2990,1005 U14.A@2990,1025.5 3000.5,1025.5 3035,1060 3035,1410 2990,1455 2990,1455.5 U12.A@2980.5,1455.5 ; U11.A@2990,1250.5 2990,1247.5 3031.25,1206.25
  Component Side w25: v1(920,1045) C60.1@962.5,1045 ; L8.2@2214.84,205 2219.84,200 v1(2330,200)
  other v1: 2760,975 605.31,1285.31 555.31,1345.31 605.31,1345.31 2335,2015
  other v2: 1465,925 1804.53,1460
VDDPLL: C8.0 C9.0 C10.0 L3.2 U4.45 | length 392.6
  Component Side w8: L3.2@1605.79,2103.29 L3.2@1607.5,2105 C10.0@1607.5,2060 C9.0@1607.5,2010 C8.0@1607.5,1965 1607.5,1952.5 1649.5,1910.5 1649.5,1875.5 1725.79,1799.21 U4.45@1725.79,1763.86
XTALIN: C81.1 U2.C6 u9.2 | length 740.7
  Component Side w5: U2.C6@1670,760.51 v2(1685.75,744.76)
  Component Side w12: v2(2105,475) C81.1@2202.5,475 2202.5,410.69 cw(c2198.31,410.69) u9.2@2198.31,406.5
  Solder Side w5: v2(1685.75,744.76) 1685.75,728.62 ccw(c1768.71,728.62) 1710.05,669.95 1857.5,522.5 ccw(c1972.18,637.18) 1972.18,475 v2(2105,475)
XTALOUT: C80.1 U2.C7 u9.1 | length 732.2
  Component Side w5: v2(1620,745) 1625,745 U2.C7@1640,760
  Component Side w12: v2(2032.5,397.5) C80.1@2032.5,340 2108.19,340 u9.1@2111.69,343.5
  Solder Side w5: v2(1620,745) 1620.86,745 cw(c1620.86,710.86) 1645,735 cw(c1620.86,710.86) 1655,710.86 ccw(c1729.5,710.86) 1676.82,658.18 ; 1680,655 1908.21,426.79 ccw(c1978.92,497.5) 1978.92,397.5 v2(2032.5,397.5)
pads on no net: C26.1 COAX.NC FD1.NC FD2.NC FD3.NC J2.3 J2.HOLE LOCK.NC SW1.4 SW1.5 SW3.4 SW3.5 U2.A11 U2.B11 U2.C4 U2.C10 U2.D1 U2.D2 U2.D3 U2.D11 U2.E1 U2.E4 U2.E5 U2.E7 U2.E8 U2.E10 U2.F2 U2.F3 U2.F4 U2.F5 U2.F6 U2.G2 U2.G3 U2.G5 U2.H2 U2.H3 U2.H6 U2.H8 U2.J1 U2.J2 U2.J3 U2.J4 U2.J7 U2.K1 U2.K2 U2.K5 U2.K6 U2.L8 U4.11 U4.12 U4.23 U4.24 U4.38 U4.39 u10.2 u10.3 u10.4 u10.5 u10.8 u10.9 u10.10 u10.11 V3P3.NC

## Polygon pours and split planes (outlines as drawn)
V5P0 on Solder Side "Solder Side-No Net" (solid, pour order 6): 1230,220 705,220 340,585 340,1670 310,1700 242.29,1700 236.44,1695.99 220,1675.19 220,560 655,125 1245,125 1275,155 1275,165 1275,200 1255,220
V1P2 on Solder Side "Solder Side-No Net" (solid, remove dead copper, pour order 4): 2605,770 2510,675 2510,510 2535,485 2690,485 2800,595 2800,1615 2615,1800 870,1800 855,1800 830,1775 830,1640 970,1500 2445,1500 2605,1340
V12P0 on Solder Side "V12P0Pour" (solid, pour order 10): 2790,1655 2815,1630 2815,570 2760,515 2760,490 2775,475 2870,475 2885,490 2885,1685 2835,1735 2810,1735 2790,1715
NetJ9_2 on Solder Side "Coax Pour" (solid, pour order 5): 2485,2065 2495,2075 2555,2075 2590,2075 2625,2075 2955,1745 2955,1695 2935,1675 2915,1675 2595,1995 2545,1995 2485,2055
V5P0 on Solder Side "V5 Pour" (solid, pour order 9): 980,150 980,355 1060,435 1355,435 1475,315 1860,315 2060,115 2540,115 2960,535 2960,1630 2995,1665 2995,1720 3010,1735 3040,1735 3055,1720 3055,1660 3055,460 2625,30 2105,30 2015,30 1845,200 1365,200 1220,345 1125,345 1110,330 1110,155 1105,150
GND on Ground Plane (split plane): 3079.9,20.1 20.1,20.1 20.1,2229.9 1645.41,2229.9 1645.41,2073.23 1645.8,2069.31 1646.94,2065.54 1648.8,2062.06 1651.3,2059.02 1654.35,2056.52 1657.82,2054.66 1661.59,2053.52 1665.51,2053.13 1804.49,2053.13 1808.41,2053.52 1812.18,2054.66 1815.65,2056.52 1818.7,2059.02 1821.2,2062.06 1823.06,2065.54 1824.2,2069.31 1824.59,2073.23 1824.59,2229.9 3079.9,2229.9
VDDIO1 on Power Plane (split plane): 3079.9,20.1 20.1,20.1 20.1,2229.9 1645.41,2229.9 1645.41,2073.23 1645.8,2069.31 1646.94,2065.54 1648.8,2062.06 1651.3,2059.02 1654.35,2056.52 1657.82,2054.66 1661.59,2053.52 1665.51,2053.13 1804.49,2053.13 1808.41,2053.52 1812.18,2054.66 1815.65,2056.52 1818.7,2059.02 1821.2,2062.06 1823.06,2065.54 1824.2,2069.31 1824.59,2073.23 1824.59,2229.9 3079.9,2229.9

## Keep-outs
Keep-Out Layer:
  lines w10: 0,0 3105,0 3105,2255 0,2255 0,0

## Other copper
Component Side:
  region net GND: 2570,335 2610,335 2615,330 2615,95 2605,85 2575,85 2570,90
  region net GND: 80,780 80,625 95,610 150,610 165,625 165,775
  region net GND: 70,1395 70,1240 85,1225 140,1225 155,1240 155,1390
  region net V5P0: 70,1550 305,1550 320,1565 320,1630 300,1650 70,1650
  region net V5P0: 75,940 310,940 325,955 325,1020 305,1040 75,1040
  region net V5P0: 1180,172.5 1180,45 1220,45 1227.5,52.5 1227.5,120
  region net V5P0: 975,190 1060,190 1085,165 1085,125 1005,125 975,155
  region net V5P0: 1180,135 1180,172.5 1237.5,230 1237.5,255 1242.5,260 1287.5,260 1292.5,255 1292.5,185 1227.5,120 1195,120
  region net V1P2: 800,1780 815,1795 895,1795 910,1780 910,1635 900,1625 800,1625
  region net V5P0: 435,1675 430,1680 280,1680 280,1620 300,1600 435,1600
  region net GND: 435,1705 280,1705 280,1755 300,1775 435,1775
  region net NetJ1_1: 1415,130 1415,185 1370,230 1370,255 1365,260 1320,260 1315,255 1315,185 1370,130
  region net NetL5_1: 2375,1970 2375,1990 2385,2000 2425,2000 2450,1975 2450,1960 2510,1960 2510,2010 2480,2040 2390,2040 2365,2015 2365,1970
  region net GND: 2355,1960 2275,1960 2275,1900 2285,1890 2355,1890
  region net VDDD: 2385,1955 2385,1890 2410,1890 2415,1885 2545,1885 2545,1935 2415,1935 2395,1955
  region net VDDIO1: 2355,1970 2325,1970 2305,1990 2275,1990 2275,2025 2290,2040 2330,2040 2355,2015
  region net V12P0: 2715,595 2875,595 2885,585 2885,485 2875,475 2730,475 2715,490
  region net NetJ9_2: 2480,2110 2510,2110 2570,2050 2570,2040 2560,2030 2510,2030 2480,2060
  region net GND: 2475,2210 2475,2135 2510,2135 2535,2160 2535,2200 2525,2210
  region net NetC76_0: 2455,2210 2455,2080 2435,2060 2340,2060 2340,2150 2300,2190 2300,2210
  region net NetL12_2: 2280,2210 2280,2060 2160,2060 2110,2110 2065,2110 2065,2185 2060,2190 2060,2210
  region net NetC21_1: 2040,2210 2040,2110 1990,2110 1990,2180 2020,2210
  region net GND: 1660,2230 1620,2230 1615,2225 1615,2140 1620,2135 1660,2135
  region net GND: 1810,2230 1850,2230 1850,2115 1845,2110 1810,2110
  region net VDDIO1: 530.31,1255.31 530.31,1360.31 cw(c535.31,1360.31) 535.31,1365.31 685.31,1365.31 ccw(c685.31,1360.31) 680.31,1360.31 680.31,1235 640.63,1235 620.31,1255.31
  region net V5P0: 450.31,1285.31 325.31,1285.31 ccw(c325.31,1275.31) 315.31,1275.31 315.31,1205.31 ccw(c325.31,1205.31) 325.31,1195.31 450.31,1195.31 450.31,1225.31 390.31,1225.31 cw(c390.31,1240.31) 375.31,1240.31 cw(c390.31,1240.31) 390.31,1255.31 450.31,1255.31
  region net GND: 1505,130 1505,250 cw(c1515,250) 1515,260 1575,260 cw(c1575,250) 1585,250 1585,210 cw(c1575,210) 1575,200 1540,200 ccw(c1540,180) 1520,180 1520,130
Ground Plane (plane layer: these items are gaps in the copper):
  pour cut-out: 1645,562.5 1645,457.5 1690,457.5 ccw(c1690,462.5) 1695,462.5 1695,562.5
  pour cut-out: 1690,560 1690,455 1735,455 ccw(c1735,460) 1740,460 1740,560

## Silkscreen, mask and mechanical layers (free items; w line width, h text height)
Top Overlay:
  lines w10: 495,415 575,415 ; 595,35 675,35 ; 820,1095 360,1095 295,1160 295,1435 800,1435 895,1340 895,1205 785,1095 960,1095 ; 890,1490 730,1490 ; 940,1277 1353,1277 1340,1290 1385,1245 ; 940,1895 1000,1895 1020,1875 1020,1655 1040,1635 ; 1475,1770 1500,1745 1500,1705 ; 1500,1575 1530,1575 1543,1589.5 ; 1710,1180 1845,1180 ; 2240,1695 2235,1695 ; 2400,1460 2250,1460 2235,1475 2235,1695 ; 2400,1785 2400,1770 2350,1720 2255,1720 2235,1700 2235,1695 ; 2600,1530 2650,1580 2700,1580 2740,1620 2740,1855 2735,1860 2600,1860 ; 2700,2125 2700,1874 2702,1872 ; 2790,1875 2785,1870 2660,1870 2600,1930 2600,2115 2610,2125 2795,2125 ; 2925,1615 2925,1655 ; 2965,1760 2965,2215 ; 730,1490 815,1575 815,1805 760,1860 220,1860 220,1625 355,1490 730,1490 ; 2795,1840 2795,2210 2805,2220 3010,2220 3080,2150 3080,1760 2905,1760 2875,1760 2795,1840
  text "D" at 3055,2195 h30
  text "A" at 1535,2145 h30
  text "A" at 2660,2140 h30
  text "B" at 2760,2140 h30
  text "B" at 1865,2100 h30
  text "SEL" at 945,2050 h30
  text "OSS_SEL" at 945,2005 h30
  text "OEN" at 945,1960 h30
  text "BISTEN" at 945,1915 h30
  text "0" at 1110,1855 h30
  text "1" at 1315,1855 h30
  text "C" at 2810,1840 h30
  text "MOSI" at 2620,1800 h30
  text "SCK" at 2620,1760 h30
  text "MISO" at 2620,1720 h30
  text "SSN" at 2620,1680 h30
  text "GPIO0" at 2250,1610 h30
  text "JACK" at 2765,1610 h30
  text "USB" at 2995,1610 h30
  text "GPIO1" at 2250,1570 h30
  text "COAX" at 2880,1570 h30
  text "GPIO2" at 2250,1525 h30
  text "V1P2" at 785,1500 h30
  text "GPIO3" at 2250,1485 h30
  text "D" at 2265,1155 h30
  text "V3P3" at 845,1110 h30
  text "C" at 1970,1055 h30
  text "1" at 2775,660 h30
  text "0" at 2995,660 h30
  text "0" at 700,285 h30
  text "1" at 700,135 h30
Bottom Overlay:
  lines w10: 980,875 2600,875 2600,1290 1240,1290 980,1030 980,875
  text "MINISCOPE USB_Control v2.01" at 2380,1720 h60
  text "Daniel Aharoni | 8-17-2015" at 2380,1635 h60
  text "DAharoni@mednet.ucla.edu" at 2380,1550 h60
  text "PMODE[2:0]" at 1945,1245 h30
  text "K3 : PMODE_2" at 2400,1210 h30
  text "F00 : Sync ADMux" at 1855,1200 h30
  text "F01 : Async ADMux" at 1855,1155 h30
  text "F11 : USB Boot" at 1855,1105 h30
  text "K2 : PMODE_1" at 2400,1080 h30
  text "F0F : Async SRAM" at 1856.11,1055 h30
  text "F1F : I2C, On Failure USB Boot" at 1855,1006.67 h30
  text "1FF : I2C Only" at 1855,953.33 h30
  text "K1 : PMODE_0" at 2400,950 h30
  text "0F1 : SPI, On Failure USB Boot" at 1855,900 h30
Mechanical 2:
  lines w0: 1804.49,2111.02 1804.49,2250 ; 0,0 0,0 ; 0,0 3100,0 ; 0,0 0,2250 ; 0,0 0,0 ; 0,2250 1665.51,2250 1665.51,2073.23 1804.49,2073.23 1804.49,2250 ; 0,2250 0,2250 ; 1804.49,2250 3100,2250 ; 3100,0 3100,0 ; 3100,0 3100,2250 ; 3100,2250 3100,2250

## Dimensions
0,0 to 3105,0 on Mechanical 1
0,0 to 0,2255 on Mechanical 1